# Altium PCB PCB1.PcbDoc
Units mm, origin at the board's own origin, x right, y up, seen from the top; angles counter-clockwise.
Board outline 38.6 x 37.7 mm, 2 copper layers (Top Layer, Bottom Layer); 48 components, 18 nets, 120 pads, 16 vias.
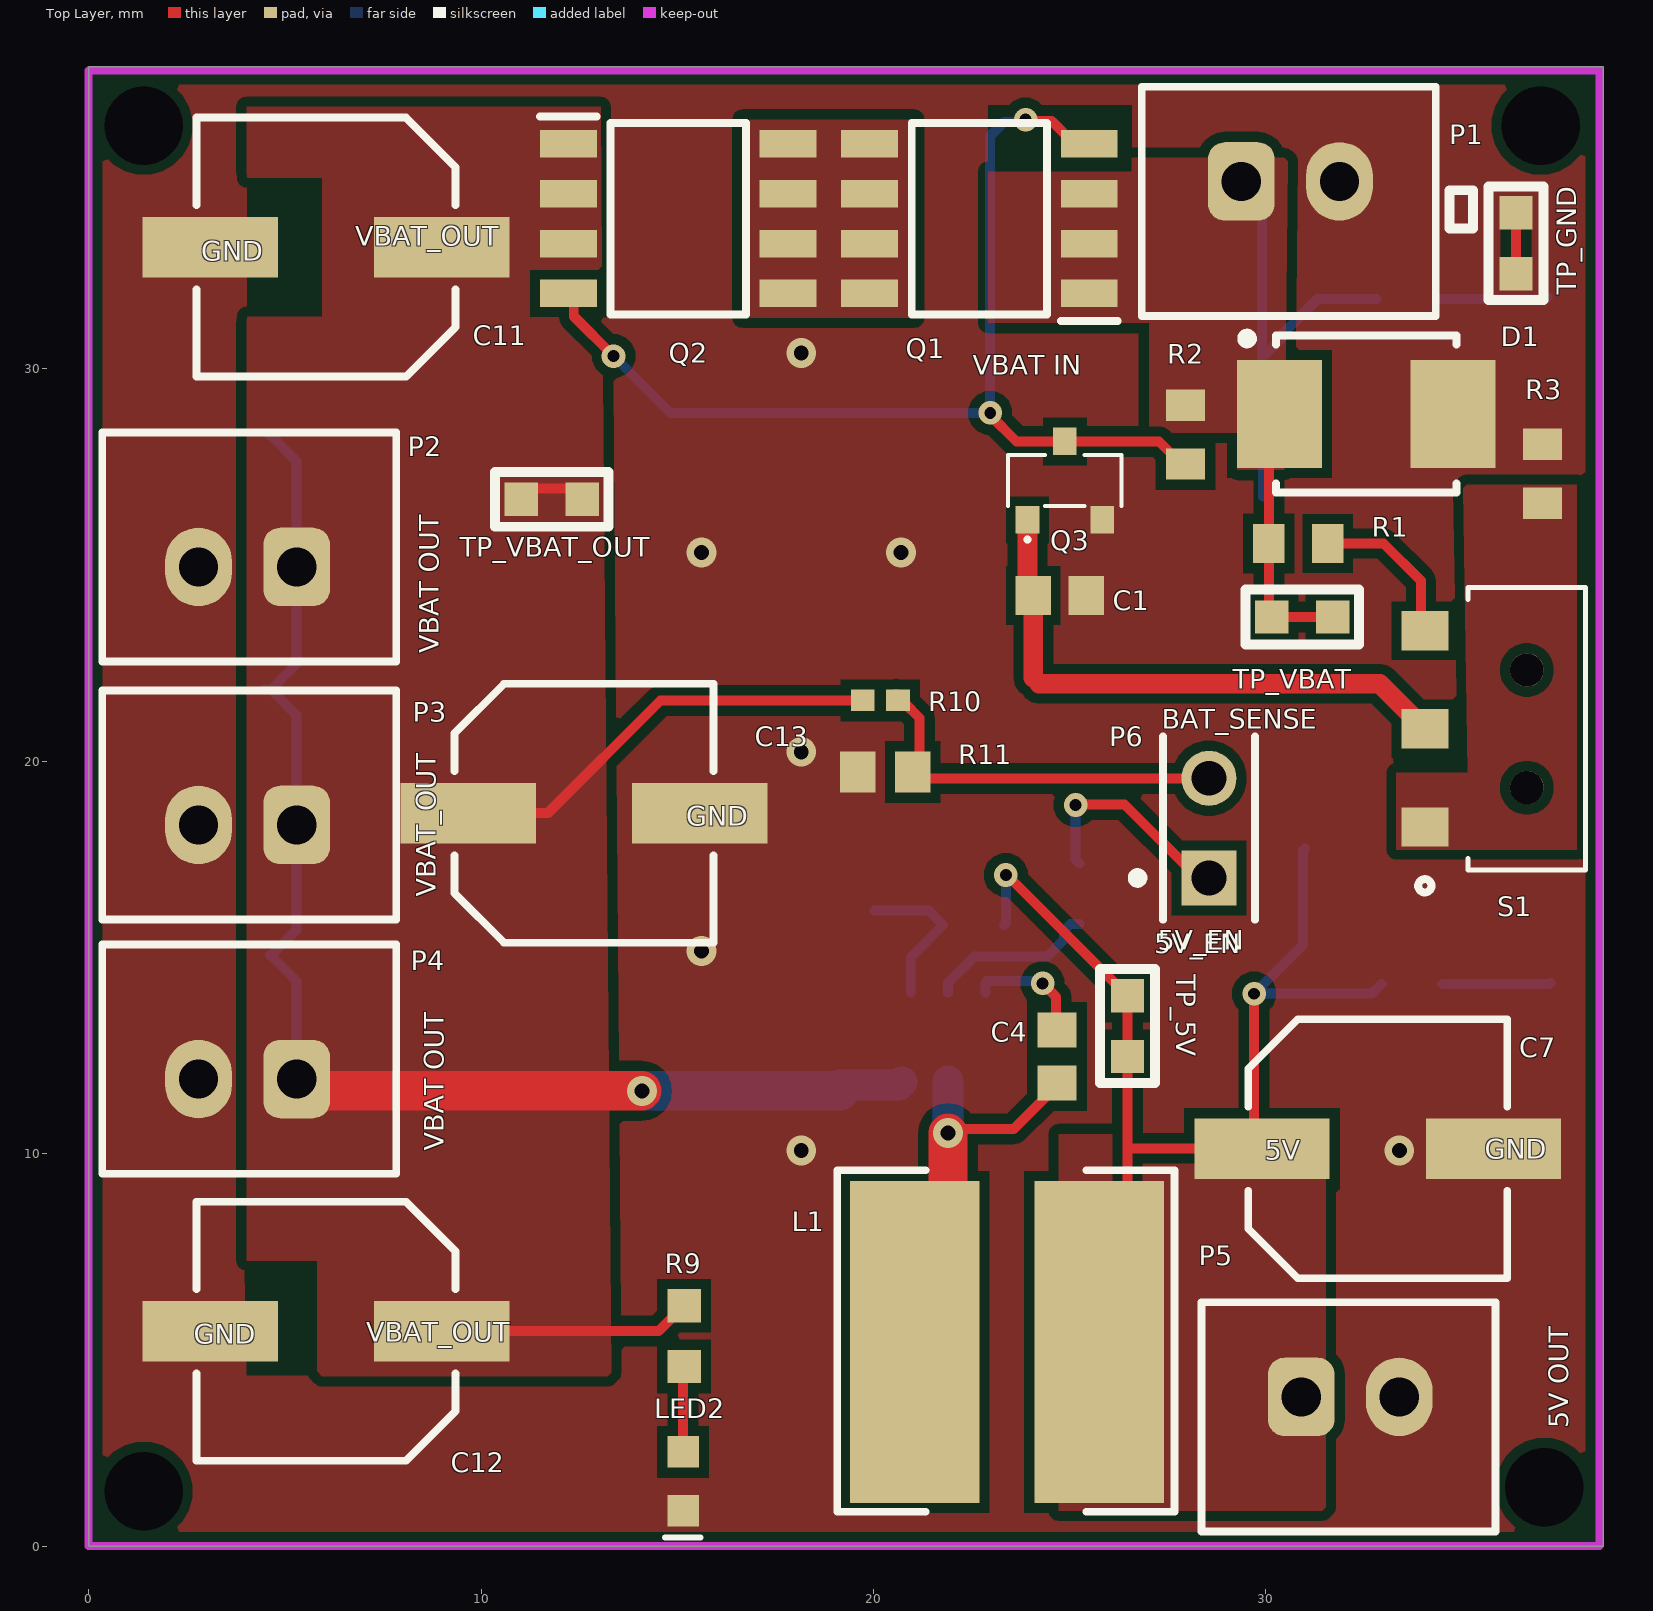
[diagram p0: Top Layer view]
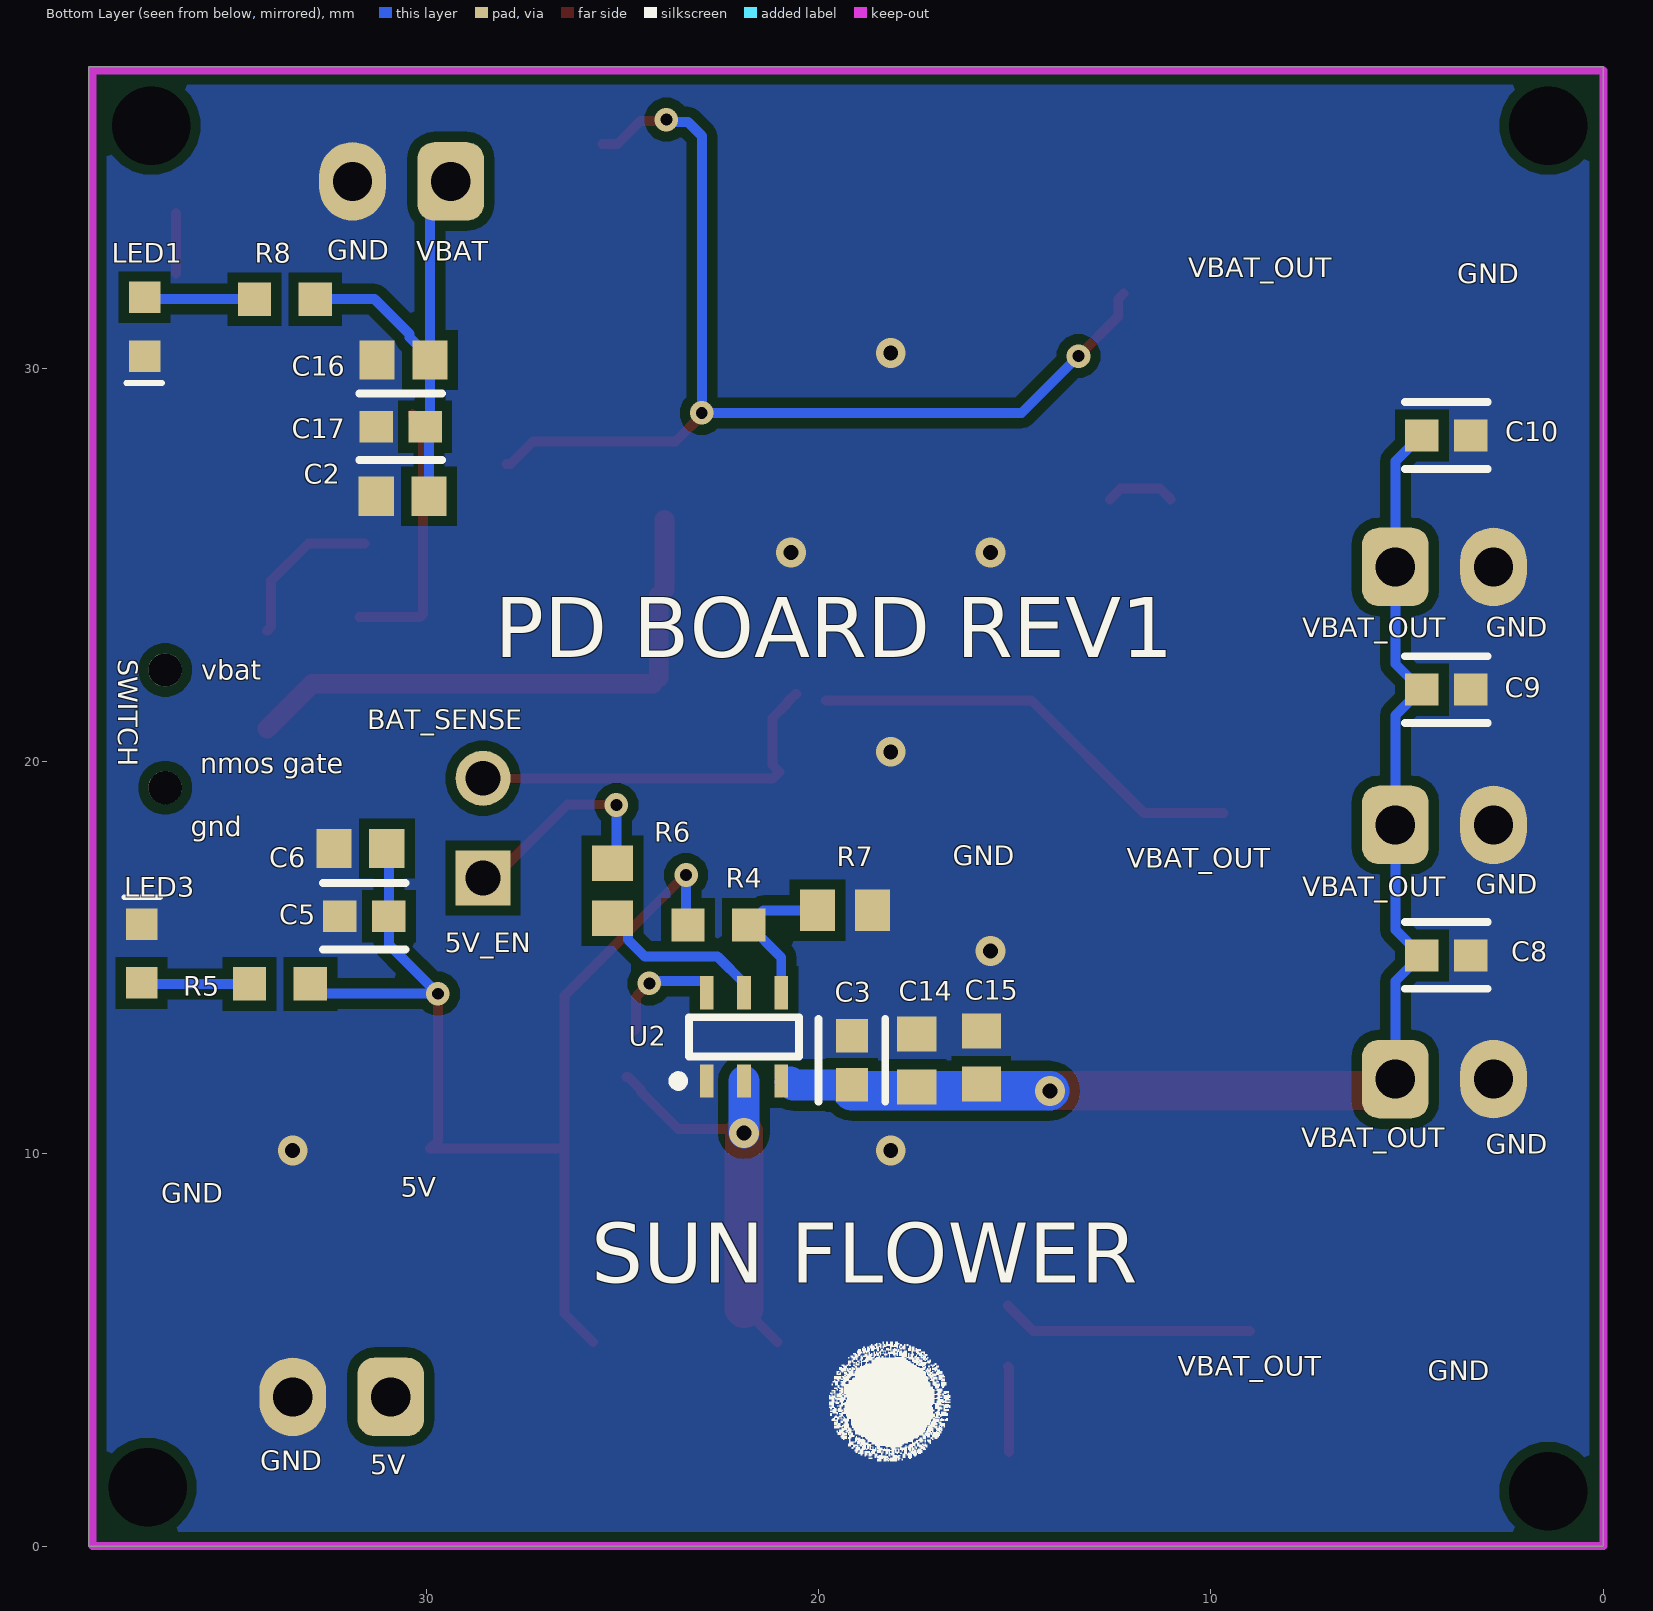
[diagram p1: Bottom Layer view, seen from below]
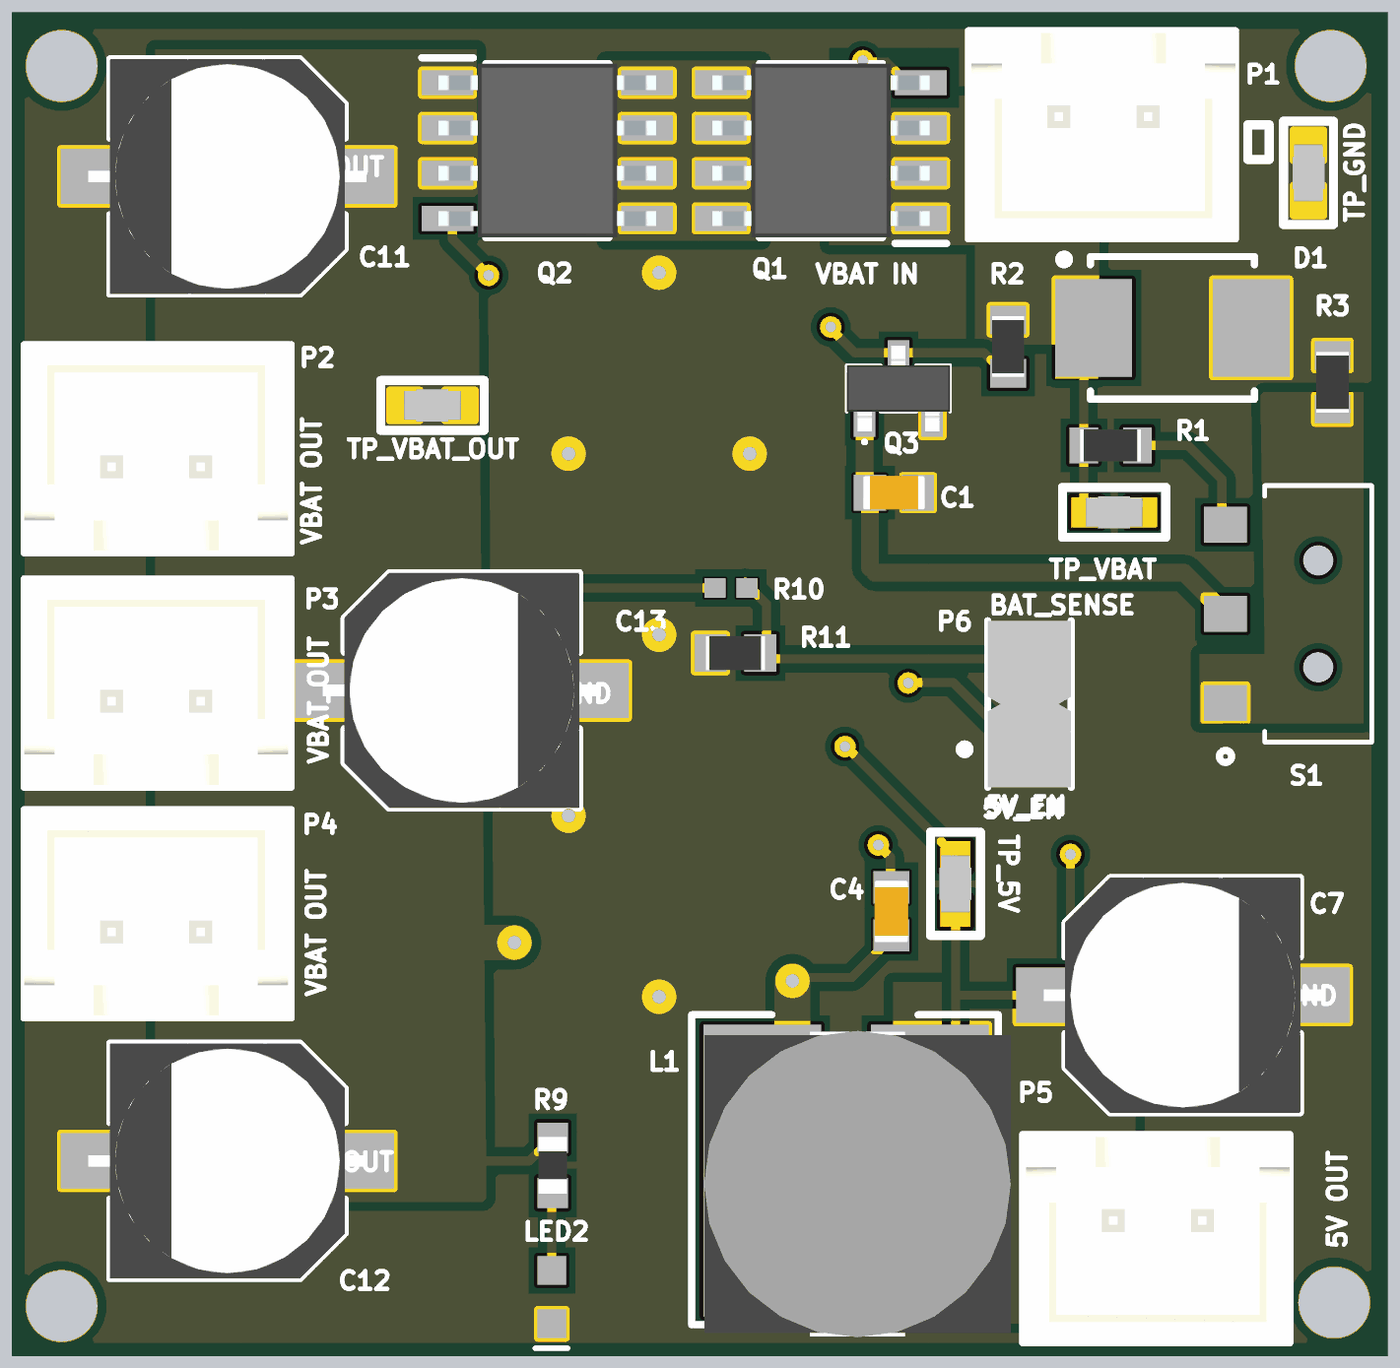
[diagram p2: 3D render of the assembled board from above, using the file's embedded part models]
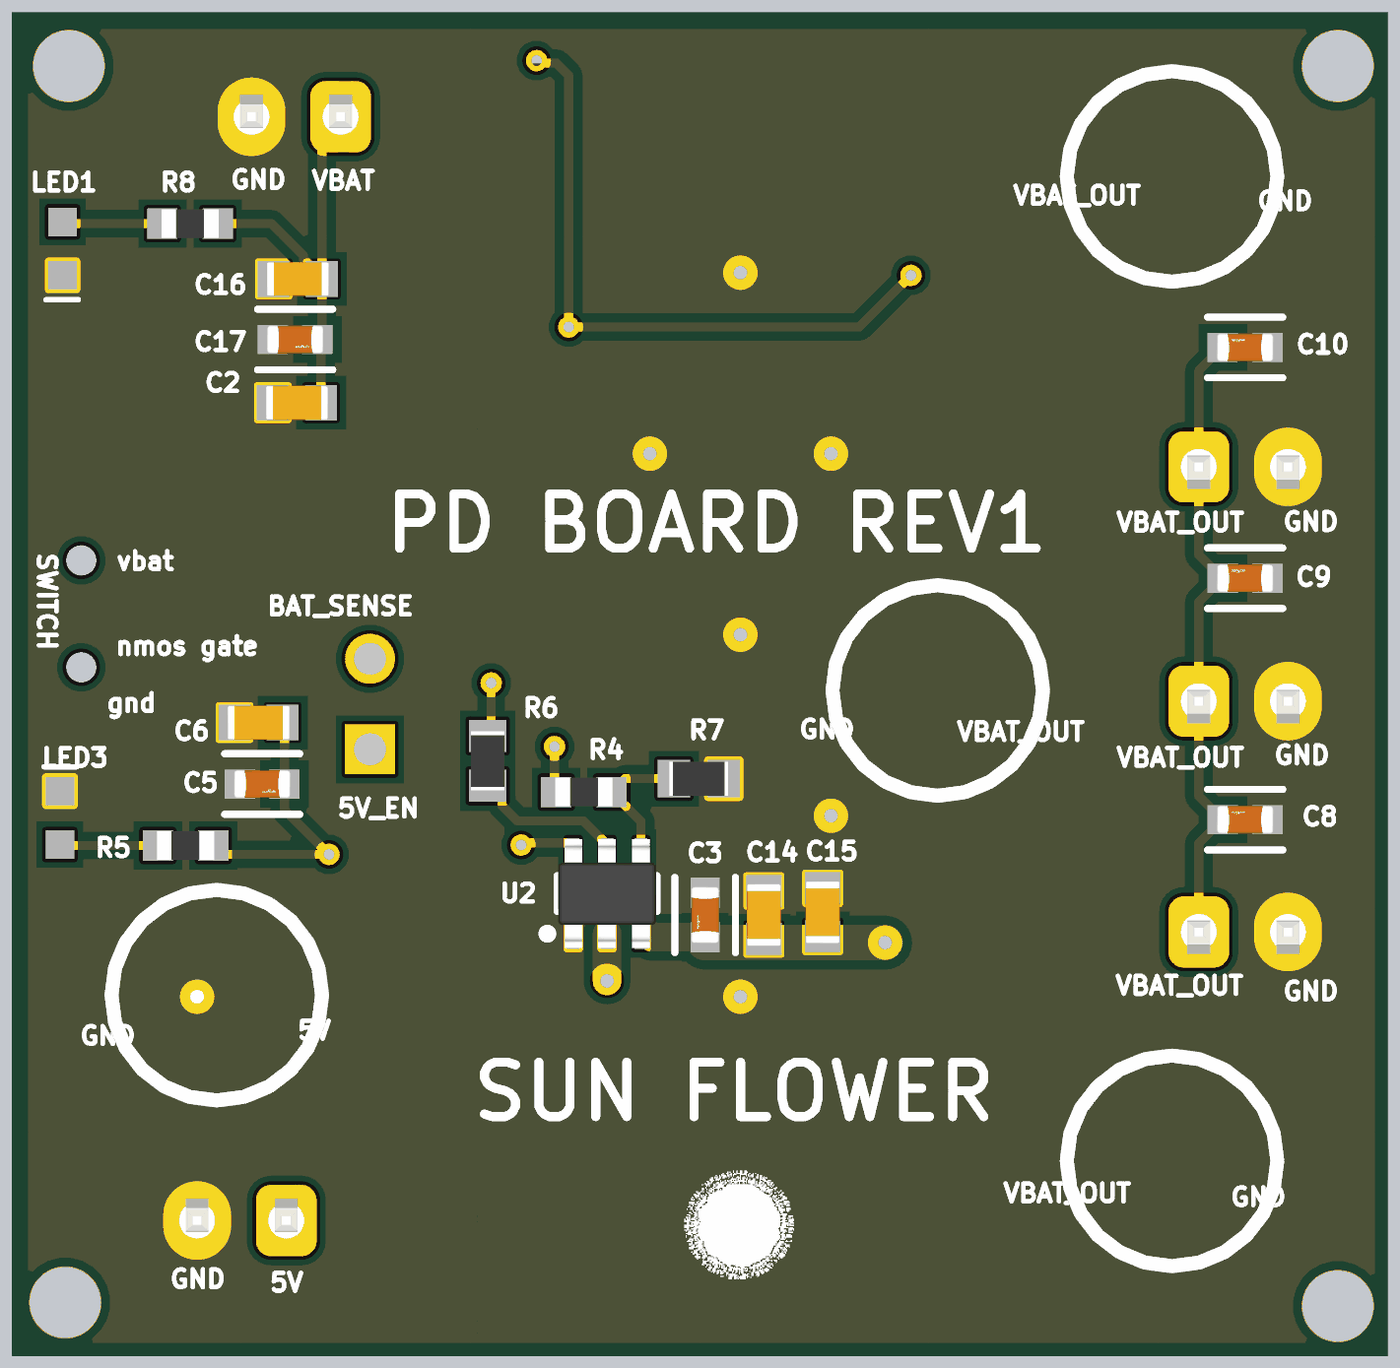
[diagram p3: 3D render of the assembled board from below, using the file's embedded part models]

## Layer stack, top to bottom
Top Solder: solder mask 0.0102, Solder Resist, Dk 3.5
Top Layer: signal copper 0.0356
Dielectric 1: dielectric 0.32, FR-4, Dk 4.8
Bottom Layer: signal copper 0.0356
Bottom Solder: solder mask 0.0102, Solder Resist, Dk 3.5

## Board outline
0,0 38.6,0 38.6,37.7 0,37.7

## Design rules (kind name [scope] priority, off if disabled: settings)
Clearance [All] p1: gap=0.254 ignorepadtopadclearanceinfootprint=FALSE except(0: Arc-Hole Track-Hole SMDPad-Hole THPad-Hole Via-Hole Fill-Hole Poly-Hole Region-Hole Text-Hole)
PlaneConnect [All] p1: planeconnectstyle=Direct reliefexpansion=0.508 reliefentries=4 reliefconductorwidth=0.254 reliefairgap=0.254
PolygonConnect PolygonConnect_1 [All vs IsNamedPolygon('NONET_L-01_P-001')] p1: connectstyle=Direct reliefconductorwidth=0.254 reliefentries=4 polygonreliefangle="90 Angle" airgapwidth=0.254
PolygonConnect [All] p2: connectstyle=Direct reliefconductorwidth=0.254 reliefentries=4 polygonreliefangle="90 Angle" airgapwidth=0.254
RoutingVias [All] p1: holewidth=0.711 width=1.27 viastyle="Through Hole" minholewidth=0.711 minwidth=1.27 maxholewidth=0.711 maxwidth=1.27
SolderMaskExpansion [All] p1: expansion=0.102 istentingtop=FALSE
Width [All] p1: maxlimit=5 minlimit=0.254 preferedwidth=0.254 minimp=50.000000 maximp=50.000000 favimp=50.000000
29 further rules are at their usual default settings.

## Components (designator, comment, footprint, x,y, rotation, side; value= is the part's Value field where it differs from the comment)
C1 "CAP CER 1UF 50V 10% X7R 0603" "CAP, 0603" 24.75,24.225 r0 top value=1µF
C2 "CMP-013-0018-1" "CAP, 0603" 30.6,26.75 r0 bottom value=10µF
C3 "CAP_0.1UF_50V_X7R_0603" FP-GCJ188-0_2-IPC_C 19.15,12.375 r270 bottom value=100nF
C4 "CMP-013-0022-3" "CAP, 0603" 24.675,12.475 r270 top value=100nF
C5 "CAP_0.1UF_50V_X7R_0603" FP-GCJ188-0_2-IPC_C 31.575,16.05 r180 bottom value=100nF
C6 "CMP-013-0018-1" "CAP, 0603" 31.675,17.775 r0 bottom value=10µF
C7 "CMP-013-0000-3" "CAP ALUM 6.3MM RADIAL SMD" 32.85,10.125 r0 top value=47µF
C8 "CAP_0.1UF_50V_X7R_0603" FP-GCJ188-0_2-IPC_C 4,15.05 r0 bottom value=100nF
C9 "CAP_0.1UF_50V_X7R_0603" FP-GCJ188-0_2-IPC_C 4,21.825 r0 bottom value=100nF
C10 "CAP_0.1UF_50V_X7R_0603" FP-GCJ188-0_2-IPC_C 4,28.3 r0 bottom value=100nF
C11 "CMP-013-0000-3" "CAP ALUM 6.3MM RADIAL SMD" 6.05,33.1 r180 top value=47µF
C12 "CMP-013-0000-3" "CAP ALUM 6.3MM RADIAL SMD" 6.05,5.475 r180 top value=47µF
C13 "CMP-013-0000-3" "CAP ALUM 6.3MM RADIAL SMD" 12.625,18.675 r0 top value=47µF
C14 "CMP-013-0018-1" "CAP, 0603" 17.5,12.375 r90 bottom value=10µF
C15 "CMP-013-0018-1" "CAP, 0603" 15.85,12.45 r90 bottom value=10µF
C16 "CMP-013-0018-1" "CAP, 0603" 30.575,30.225 r0 bottom value=10µF
C17 "CAP_0.1UF_50V_X7R_0603" FP-GCJ188-0_2-IPC_C 30.65,28.525 r180 bottom value=100nF
D1 "P6SMB12AT3G" ONSC-SMB-2-403A-03_J_V 32.56,28.85 r0 top
L1 "CMP-009-0008-2" "IND 3.3UH 5.2A 20 MOHM SMD VLP8040" 21.05,5.2 r0 top
LED1 "LED YELLOW CLEAR 2.1V 0603" LED_0603 37.175,31.075 r270 bottom
LED2 "LED GREEN CLEAR 2V 0603" LED_0603 15.15,1.65 r270 top
LED3 "LED BLUE CLEAR 2.8V 0603" LED_0603 37.25,15.1 r90 bottom
P1 "VBAT POWER IN" B2B-XH 29.375,34.775 r0 top
P2 "VBAT POWER OUT" B2B-XH 5.3,24.95 r180 top
P3 "VBAT POWER OUT" B2B-XH 5.3,18.375 r180 top
P4 "VBAT POWER OUT" B2B-XH 5.3,11.9 r180 top
P5 "5V POWER" B2B-XH 30.9,3.8 r0 top
P6 "5-146280-2" TECO-5-146280-2_V 28.55,18.295 r90 top
Q1 "SI4459BDY-T1-GE3" SI4459BDY-T1-GE3-Footprint-1 22.7,33.825 r180 top
Q2 "SI4459BDY-T1-GE3" SI4459BDY-T1-GE3-Footprint-1 15.025,33.825 r0 top
Q3 "T2N7002AK,LM" TBAT54CLM 24.875,27.15 r0 top
R1 "Resistor 100k +/-1% 0603 100 mW" RESC1608X55X25ML10T15 30.825,25.55 r180 top value=100k
R2 "Resistor 100k +/-1% 0603 100 mW" RESC1608X55X25ML10T15 27.95,28.325 r90 top value=100k
R3 "Resistor 100k +/-1% 0603 100 mW" RESC1608X55X25ML10T15 37.05,27.325 r270 top value=100k
R4 "CMP-010-0030-1" "RES, 0603" 22.55,15.825 r180 bottom
R5 "RES 4.7K OHM 1% 1/10W 0603" "RES, 0603" 33.725,14.325 r0 bottom
R6 "RES SMD 10K OHM 1% 1/10W 0603" RESC1609X50X30ML8T20 25.25,16.7 r90 bottom
R7 "RES SMD 10K OHM 1% 1/10W 0603" RESC1609X50X30ML8T20 19.325,16.2 r0 bottom
R8 "RES 4.7K OHM 1% 1/10W 0603" "RES, 0603" 33.6,31.775 r0 bottom
R9 "RES 4.7K OHM 1% 1/10W 0603" "RES, 0603" 15.175,5.35 r270 top
R10 "RES 6.8K OHM 5% 1/16W 0402" "RES 0402" 20.175,21.55 r180 top value=6.8k
R11 "RES SMD 10K OHM 1% 1/10W 0603" RESC1609X50X30ML8T20 20.3,19.725 r0 top
S1 "AYZ0102AGRLC" SW_AYZ0102AGRLC 36.5,20.825 r90 top
TP_5V "Test Point 0603 SMD" "TEST POINT 0603 SMD" 26.475,12.475 r90 top
TP_GND "Test Point 0603 SMD" "TEST POINT 0603 SMD" 36.375,32.425 r90 top
TP_VBAT "Test Point 0603 SMD" "TEST POINT 0603 SMD" 31.7,23.675 r180 top
TP_VBAT_OUT "Test Point 0603 SMD" "TEST POINT 0603 SMD" 12.575,26.675 r180 top
U2 "CMP-008-0027-1" "IC REG BUCK 4.5V TO 17V, 5A" 21.9,12.975 r90 bottom

## Footprints (in the part's own frame and the unit in brackets; to place one, negate y for a bottom-side part, rotate by r counter-clockwise, add the part's x,y. Pads: shape width x height; smd on the part's side, far side on the other; paste and mask are expansions set on the pad)
B2B-XH [mm] "JST 2-pin Header"
  rrect50% 1.7x2 hole 1: 1(0,0)
  oval 1.7x2 hole 1: 2(2.5,0)
  silkscreen extent -2.54,-3.43 4.95,2.41, body extent -2.45,-3.4 4.95,2.35, height 7
"CAP ALUM 6.3MM RADIAL SMD" [mm] "Aluminum Electrolytic Capacitor, Body 6.50x6.50x5.50mm, IPC Low Density"
  rect 3.45x1.55 smd: 1(-2.95,0) 2(2.95,0)
  silkscreen extent -3.3,-3.3 3.3,3.3, body extent -3.9,-3.3 3.9,3.3, height 5.5
"CAP, 0603" [mm] "Chip Capacitor, 2-Leads, Body 1.60x0.81mm, IPC Medium Density"
  rect 0.9x1 smd mask+0.076: 1(-0.675,0) 2(0.675,0)
  body extent -0.87,-0.48 0.87,0.48, height 0.9
FP-GCJ188-0_2-IPC_C [mm]
  rect 0.855x0.812 smd paste+0 mask+0: 1(-0.625,0) 2(0.625,0)
  silkscreen extent -1.05,-0.85 1.05,0.85, body extent -0.8,-0.4 0.8,0.4, height 0.9
"IC REG BUCK 4.5V TO 17V, 5A" [mm] "Buck Switching Regulator IC Positive Adjustable 0.6V 1 Output 5A SOT-23-6 Thin, TSOT-23-6"
  rect 0.85x0.35 smd: 1(-1.125,0.95) 2(-1.125,0) 3(-1.125,-0.95) 4(1.125,-0.95) 5(1.125,0) 6(1.125,0.95)
  silkscreen extent -1.25,-1.4 0.5,1.8, body extent -1.53,-1.38 1.53,1.38, height 1.1
"IND 3.3UH 5.2A 20 MOHM SMD VLP8040" [mm] "IND 3.3UH 5.2A 20 MOHM SMD"
  rect 3.3x8.2 smd: 1(0,0) 2(4.7,0)
  silkscreen extent -1.97,-4.32 6.63,4.38, body extent -1.62,-4.67 6.98,3.93, height 4.1
LED_0603 [mm]
  rect 0.8x0.8 smd: 1(-0.75,0) 2(0.75,0)
  silkscreen extent 1.43,-0.47 1.43,0.44, body extent -0.79,-0.4 0.81,0.4, height 0.8
ONSC-SMB-2-403A-03_J_V [mm] "Molded, 2-Leads, Body 4.6x3.95mm"
  rect 2.159x2.743 smd: 1(-2.21,0) 2(2.21,0)
  silkscreen extent -3.16,-2 2.3,2.05, body extent -2.3,-1.97 2.3,1.97, height 2.47
"RES 0402" [mm]
  rect 0.6x0.55 smd mask+0.05: 1(-0.45,0) 2(0.45,0)
  body extent -0.55,-0.27 0.55,0.28, height 0.5
"RES, 0603" [mm] "Chip Resistor, 2-Leads, Body 1.60x0.80mm, IPC Medium Density"
  rect 0.85x0.85 smd: 1(-0.775,0) 2(0.775,0)
  body extent -0.8,-0.4 0.8,0.4, height 0.55
RESC1608X55X25ML10T15 [mm] "Chip Resistor, 2-Leads, Body 1.70x0.90mm, IPC Low Density"
  rect 0.8x1 smd: 1(-0.75,0) 2(0.75,0)
  body extent -0.85,-0.45 0.85,0.45, height 0.55
RESC1609X50X30ML8T20 [mm] "Chip Resistor, 2-Leads, Body 1.65x0.95mm, IPC Low Density"
  rect 0.9x1.05 smd: 1(-0.7,0) 2(0.7,0)
  body extent -0.82,-0.48 0.82,0.48, height 0.5
SI4459BDY-T1-GE3-Footprint-1 [mm]
  rect 1.45x0.7 smd: 1(-2.8,1.905) 2(-2.8,0.635) 3(-2.8,-0.635) 4(-2.8,-1.905) 5(2.8,-1.905) 6(2.8,-0.635) 7(2.8,0.635) 8(2.8,1.905)
  silkscreen extent -3.52,-2.44 1.73,2.61, body extent -3.05,-2.44 3.05,2.44, height 3.23
SW_AYZ0102AGRLC [mm]
  rect 1x1.2 smd: 1(-2.5,2.45) 2(0,2.45) 3(2.5,2.45)
  round 0.85 hole 0.85 unplated: ""(-1.5,-0.15) ""(1.5,-0.15)
  silkscreen extent -4.17,-1.65 3.6,2.62
TBAT54CLM [mm]
  rect 0.6x0.7 smd: 1(-0.95,-1) 2(0.95,-1) 3(0,1)
  silkscreen extent -1.45,-1.55 1.45,0.65, body extent -1.45,-1.2 1.45,1.2, height 0.95
TECO-5-146280-2_V [mm] "Connector, 2-Leads, Body 4.67x2.34mm, Pitch 2.54mm"
  rect 1.4x1.4 hole 0.89: 1(-1.27,0)
  round 1.4 hole 0.89: 2(1.27,0)
  silkscreen extent -2.33,-1.17 2.33,1.94, body extent -2.34,-1.17 2.34,1.17, height 5.33
"TEST POINT 0603 SMD" [mm]
  rect 0.85x0.85 smd paste-2 mask+0.102: 1(0,0)
  rect 0.85x0.85 smd paste-2: 1(1.55,0)
  silkscreen extent -0.67,-0.7 2.22,0.7, body extent -0.02,-0.45 1.58,0.45, height 1.09

## Part data
C1: library part CMP-013-0013-1, "1µF ±10% 50V Ceramic Capacitor X7R 0603 (1608 Metric)", Manufacturer 1="Taiyo Yuden", Manufacturer Part Number 1=UMK107AB7105KA-T, Operating Temperature="-55°C ~ 125°C", Package / Case="0603 (1608 Metric)", Ratings=-, Temperature Coefficient=X7R, Tolerance=10%, Voltage=50V, ComponentLink1Description=http://www.yuden.co.jp/productdata/catalog/en/mlcc_all_e.pdf, ComponentLink1URL=http://www.yuden.co.jp/productdata/catalog/en/mlcc_all_e.pdf, Design Item ID="CAP CER 1UF 50V 10% X7R 0603", Height - Seated (Max)=-, Lead Spacing=-, Lead Style=-, Mounting Type="Surface Mount, MLCC", Packaging="Cut Tape (CT)", Part Status=Active, Source="Schematic Diagrams.SchLib"
C2 C6 C14 C15 C16: "10µF ±20% 25V Ceramic Capacitor X5R 0603 (1608 Metric)", Manufacturer 1="Murata Electronics North America", Manufacturer Part Number 1=GRM188R61E106MA73D, Operating Temperature="-55°C ~ 85°C", Package / Case="0603 (1608 Metric)", Ratings=-, Temperature Coefficient=X5R, Tolerance=20%, Voltage=25V, ComponentLink1Description=http://www.murata.com/~/media/webrenewal/support/library/catalog/products/capacitor/mlcc/c02e.ashx, ComponentLink1URL=http://www.murata.com/~/media/webrenewal/support/library/catalog/products/capacitor/mlcc/c02e.ashx, Design Item ID="CAP CER 10uF 25V 20% X5R 0603", Height - Seated (Max)=-, Lead Spacing=-, Lead Style=-, Mounting Type="Surface Mount, MLCC", Packaging="Cut Tape (CT)", Part Status=Active, Size / Dimension="0.063\" L x 0.031\" W (1.60mm x 0.80mm)", Source="Schematic Diagrams.SchLib", Thickness (Max)="0.031\" (0.80mm)"
C3 C5 C8 C9 C10 C17: library part CMP-001-00108-2, "CAP CER 0.1UF 50V X7R 0603", Capacitor Type=Ceramic, Case/Package=0603, Manufacturer 1="Murata Electronics", Manufacturer Part Number 1=GCJ188R71H104KA12D, Max Operating Temperature=125°C, Min Operating Temperature=-55°C, Temperature Coefficient=X7R, Tolerance=10%, Voltage Rating=50V, Mounting Technology="Surface Mount", Pins=2, RoHS Compliant=Yes
C4: "0.10µF ±10% 50V Ceramic Capacitor X7R 0603 (1608 Metric)", Manufacturer 1="AVX Corporation", Manufacturer Part Number 1=06035C104KAT2A, Operating Temperature="-55°C ~ 125°C", Package / Case="0603 (1608 Metric)", Ratings=-, Supplier Part Number 1=478-5052-1-ND, Tolerance=10%, Voltage=50V, ComponentLink1Description=http://datasheets.avx.com/X7RDielectric.pdf, ComponentLink1URL=http://datasheets.avx.com/X7RDielectric.pdf, Design Item ID="CAP CER 0.1UF 50V 10% X7R 0603", Height - Seated (Max)=-, Lead Spacing=-, Lead Style=-, Mounting Type="Surface Mount, MLCC", Packaging="Cut Tape (CT)", Part Status=Active, Size / Dimension="0.063\" L x 0.032\" W (1.60mm x 0.81mm)", Source="Schematic Diagrams.SchLib", Supplier 1=Digi-key, Thickness (Max)="0.035\" (0.90mm)"
C7 C11 C12 C13: "47µF 35V Aluminum Electrolytic Capacitors Radial, Can - SMD 1000 Hrs @ 85°C", Case/Package=Radial, Manufacturer 1=Panasonic, Manufacturer Part Number 1=EEE-1VA470WP, Max Operating Temperature=85°C, Min Operating Temperature=-40°C, Package Quantity=1, Ripple Current=70mA, Supplier Part Number 1=PCE3961DKR-ND, Tolerance=20%, Voltage Rating=35V, ComponentLink1Description=https://datasheet.ciiva.com/2983/aba0000ce2-2983926.pdf, ComponentLink1URL=https://datasheet.ciiva.com/2983/aba0000ce2-2983926.pdf, ComponentLink2Description=https://datasheet.ciiva.com/2983/aba0000ce2-2983927.pdf, ComponentLink2URL=https://datasheet.ciiva.com/2983/aba0000ce2-2983927.pdf, ComponentLink3Description=https://datasheet.ciiva.com/14598/70255710-14598937.pdf, ComponentLink3URL=https://datasheet.ciiva.com/14598/70255710-14598937.pdf, ComponentLink4Description=https://datasheet.ciiva.com/15165/getdatasheetpartid-86239-15165868.pdf, ComponentLink4URL=https://datasheet.ciiva.com/15165/getdatasheetpartid-86239-15165868.pdf, ComponentLink5Description=https://datasheet.ciiva.com/16507/aba0000ce2-16507965.pdf, ComponentLink5URL=https://datasheet.ciiva.com/16507/aba0000ce2-16507965.pdf, ComponentLink6Description=https://datasheet.ciiva.com/30206/11aba0000ce2-30206253.pdf, ComponentLink6URL=https://datasheet.ciiva.com/30206/11aba0000ce2-30206253.pdf, Contact Plating=Tin, Design Item ID="CAP ALUM 47UF 20% 35V SMD", Diameter=6.3mm, Height=5.4mm, Height - Seated (Max)=0.213inch, Lead Free="Lead Free", Length=5.5mm, Life (Hours)=1000Hour, Mount="Surface Mount,PCB", Packaging="Tape and Reel", Pricing 1="1=0.38, 10=0.263, 100=0.1579, 500=0.11846 (USD)", Radiation Hardening=No, REACH SVHC=Unknown, Ripple Current (AC)=70mA, Source="Schematic Diagrams.SchLib", Stock 1=2820, Supplier 1=Digi-Key, Termination=SMD/SMT, Voltage Rating (DC)=35V
D1: library part CMP-1061-00398-1, "600 W Peak Power Zener Transient Voltage Suppressor, Unidirectional, 2-Pin SMB, Pb-Free, Tape and Reel", Manufacturer="On Semiconductor", ComponentLink1Description="Manufacturer URL", ComponentLink1URL=http://www.onsemi.com/, ComponentLink2Description=Datasheet, ComponentLink2URL=http://www.onsemi.com/pub_link/Collateral/P6SMB6.8AT3-D.PDF, ComponentLink3Description="Package Specification", ComponentLink3URL=http://www.onsemi.com/pub_link/Collateral/P6SMB6.8AT3-D.PDF, DatasheetVersion="Rev. J", Direction=Unidirectional, IR Max (uA)=5, Mounting Technology="Surface Mount", PackageDescription="2-Pin Small Molded Package, J-Bend Lead, Body 4.33 x 3.625 mm", PackageReference=SMB-2-403A-03_J, PackageVersion="Rev. J, 07/2012", Packing="Tape and Reel", PartNumber=P6SMB12AT3G, PPK Max (W)=600, RoHS=Pb-Free, V(BR) Typ (V)=12
L1: "3.3µH Shielded Wirewound Inductor 5.2A 20 mOhm Max Nonstandard", Case/Package=Nonstandard, Current - Saturation=1.04A, Current Rating=1.37A, DC Resistance (DCR)="170 mOhm Max", Frequency - Self Resonant=-, Frequency - Test=1MHz, Inductance=3.3µH, Inductance Tolerance=30%, Manufacturer 1="TDK Corporation", Manufacturer Part Number 1=VLS201612CX-3R3M, Max DC Current=5.2A, Max Operating Temperature=105°C, Min Operating Temperature=-40°C, Operating Temperature="-40°C ~ 105°C", Package Quantity=1, Supplier Device Package=2016, Supplier Part Number 1=445-172964-1-ND, Test Frequency=100kHz, Tolerance=20%, ComponentLink1Description=http://product.tdk.com/en/catalog/datasheets/inductor_commercial_power_vls-cx_en.pdf, ComponentLink1URL=http://product.tdk.com/en/catalog/datasheets/inductor_commercial_power_vls-cx_en.pdf, ComponentLink2Description=http://www.mouser.com/ds/2/400/nductor_commercial_power_vlp8040_en-952627.pdf, ComponentLink2URL=http://www.mouser.com/ds/2/400/nductor_commercial_power_vlp8040_en-952627.pdf, Composition=Wirewound, Core Material=Ferrite, Depth=8.7mm, Design Item ID="IND 3.3uH 5.2A 20MOHM SMD", Height=4mm, Height - Seated (Max)="0.047\" (1.20mm)", Lead Free="Lead Free", Length=0.315inch, Material - Core=Ferrite, Military Standard=Not, Mount="Surface Mount", Mounting Type="Surface Mount", Package / Case=Nonstandard, Packaging="Cut Tape (CT)", Pricing 1="1 = 0.60000, 10 = 0.52700, 100 = 0.37660, 500 = 0.31636 (USD)", Q @ Freq=-, REACH SVHC="No SVHC", RMS Current (Irms)=5.2A, RoHS="RoHS Compliant", Saturation Current=5.2A, Shielding=Shielded, Size / Dimension="0.079\" L x 0.063\" W (2.00mm x 1.60mm)", Source="Schematic Diagrams.SchLib", Stock 1=8114, Supplier 1=Digi-Key, Termination=SMD/SMT, Width=8mm
LED1: library part CMP-011-0011-2, "Yellow 590nm LED Indication - Discrete 2V 0603 (1608 Metric)", Case/Package="0603 (1608 Metric)", Color=Yellow, Current - Test=20mA, Lens Color=Colorless, Manufacturer="Wurth Electronics Inc.", Manufacturer Part Number=150060YS75000, Millicandela Rating=120mcd, Supplier Device Package=0603, Voltage - Forward (Vf) (Typ)=2V, ComponentLink1Description=http://katalog.we-online.de/led/datasheet/150060YS75000.pdf, ComponentLink1URL=http://katalog.we-online.de/led/datasheet/150060YS75000.pdf, Design Item ID="LED YELLOW CLEAR 2.1V 0603", Features=-, Height (Max)=0.80mm, Lens Style/Size="Rectangle with Flat Top, 1.10mm x 0.70mm", Lens Transparency=Clear, Mounting Type="Surface Mount", Packaging="Cut Tape (CT)", Part Status=Active, Pricing 1="1=0.21, 100=0.1617, 500=0.13964 (CAD)", RoHS="RoHS Compliant", Size / Dimension="1.60mm L x 0.80mm W", Source="Schematic Diagrams.SchLib", Stock 1=10523, Viewing Angle=140°, Wavelength - Dominant=590nm, Wavelength - Peak=595nm
LED2: library part CMP-011-0009-2, "Green 572nm LED Indication - Discrete 2V 0603 (1608 Metric)", Case/Package="0603 (1608 Metric)", Color=Green, Current - Test=20mA, Lens Color=Colorless, Manufacturer="Wurth Electronics Inc.", Manufacturer Part Number=150060VS75000, Millicandela Rating=40mcd, Supplier Device Package=0603, Voltage - Forward (Vf) (Typ)=2V, ComponentLink1Description=http://katalog.we-online.de/led/datasheet/150060VS75000.pdf, ComponentLink1URL=http://katalog.we-online.de/led/datasheet/150060VS75000.pdf, Design Item ID="LED GREEN CLEAR 2V 0603", Features=-, Height (Max)=0.80mm, Lens Style/Size="Rectangle with Flat Top, 1.10mm x 0.70mm", Lens Transparency=Clear, Mounting Type="Surface Mount", Packaging="Cut Tape (CT)", Part Status=Active, Pricing 1="1=0.21, 100=0.1617, 500=0.13964 (CAD)", RoHS="RoHS Compliant", Size / Dimension="1.60mm L x 0.80mm W", Source="Schematic Diagrams.SchLib", Stock 1=9408, Viewing Angle=140°, Wavelength - Dominant=570nm, Wavelength - Peak=572nm
LED3: library part CMP-011-0010-2, "Blue 470nm LED Indication - Discrete 2.8V 0603 (1608 Metric)", Case/Package="0603 (1608 Metric)", Color=Blue, Current - Test=5mA, Lens Color=Colorless, Manufacturer 1="Lite-On Inc.", Manufacturer Part Number 1=LTST-C193TBKT-5A, Millicandela Rating=15mcd, Supplier Device Package="Chip LED", Voltage - Forward (Vf) (Typ)=2.8V, ComponentLink1Description=http://optoelectronics.liteon.com/upload/download/DS22-2004-060/P_100_LTST-C193TBKT-5A.pdf, ComponentLink1URL=http://optoelectronics.liteon.com/upload/download/DS22-2004-060/P_100_LTST-C193TBKT-5A.pdf, Design Item ID="LED BLUE CLEAR 2.8V 0603", Height (Max)=0.45mm, Lens Style/Size="Rectangle with Flat Top, 1.15mm x 0.80mm", Lens Transparency=Clear, Mounting Type="Surface Mount", Packaging="Cut Tape (CT)", Part Status=Active, Size / Dimension="1.60mm L x 0.80mm W", Source="Schematic Diagrams.SchLib", Viewing Angle=130°, Wavelength - Dominant=470nm, Wavelength - Peak=468nm
P1 P2 P3 P4 P5: library part "1x2 Header", "1x2 Pin Header"
  P1: ComponentLink1Description="New link", ComponentLink2Description="New link 1"
P6: library part CMP-2000-07492-1, "Male Header, Pitch 2.54 mm, 1 x 2 Position, Height 8.21 mm, Tail Length 3.05 mm, -65 to 105 degC, RoHS, Bulk", Case\/Package=100, Colour=Black, Current Rating=3A, Flammability Rating=UL94V-0, High Temperature Housing=Yes, Manufacturer="TE Connectivity", Max Current Rating=5A, Max Operating Temperature=105degC, Min Operating Temperature=-65degC, Package Description="Male Header, Pitch 2.54 mm, 1 x 2 Position, Height 8.21 mm, Tail Length 3.05 mm", Package Quantity=500, Approvals=CSA, Board Standoff=No(Without), Connector Type=Header, Contact Gender=Male, Contact Material=CopperAlloy, Contact Mating Length=0.23inch, Contact Plating=Matte, Contact Protection=No(Without), Contact Shape=Square, Datasheet URL=http://www.te.com/commerce/DocumentDelivery/DDEController?Action=showdoc&DocId=Customer+Drawing%7F146280%7FH1%7Fpdf%7FEnglish%7FENG_CD_146280_H1.pdf%7F5-146280-2, Datasheet Version="Rev. H1, 08/2016", Depth=2.34mm, Gasket=No(Without), High Speed Serial Data Connector=No, Housing Colour=Black, Housing Material=Polymer, Keyed=No, Length=4.67mm, Manufacturer URL=http://www.te.com/, Mating Alignment=No(Without), Mating Connector Lock=No(Without), Mating Post Length=0.23inch, Mount=ThroughHole, Mounting Technology=ThroughHole, Number of Contacts=2, Number of Positions=2, Number of Rows=1, Orientation=Straight, Package Reference=5-146280-2, Packaging=Carton, Panel Mount Retention=No(Without), PCB Mount Retention=Without, PCB Mounting Orientation=Vertical, PCB Thickness=0.063inch, Pitch=2.54mm, Radiation Hardening=No, RoHSCompliant=true, Row Spacing=2.54mm, Selectively Loaded=No(Without), Stabilizers=No(Without), Termination=ThroughHole, Termination Post Length=0.12inch
Q1 Q2: library part CMP-031-00041-1, "Small Signal Field-Effect Transistor", RoHS Compliant=Yes
Q3: "MOSFET (N-Channel)", Manufacturer_Name=Toshiba, Mouser Part Number=757-T2N7002AKLM, Arrow Part Number=T2N7002AK,LM, Arrow Price/Stock=https://www.arrow.com/en/products/t2n7002aklm/toshiba?region=nac, Datasheet Link=http://toshiba.semicon-storage.com/info/docget.jsp?did=29712&prodName=T2N7002AK, Height=1.1mm, Manufacturer_Part_Number=T2N7002AK,LM, Mouser Price/Stock=https://www.mouser.co.uk/ProductDetail/Toshiba/T2N7002AKLM?qs=pzVvXTvk9PzfX4hYglwZ9Q%3D%3D, Supplier 1=Avnet, Supplier Part Number 1=T2N7002AK,LM
R1 R2 R3: library part CMP-009-00023-2, "Chip Resistor, 100 KOhm, +/- 1%, 0.1 W, -55 to 155 degC, 0603 (1608 Metric)", Case/Package=0603, Max Operating Temperature=155°C, Min Operating Temperature=-55°C, Power=100mW, Resistance=100k, Tolerance=1%, Voltage Rating=50V, Mounting Technology=SM, Pins=2, RoHS Compliant=True
R4: "54.9k Ohm ±1% 0.1W, 1/10W Chip Resistor 0603 (1608 Metric) Automotive AEC-Q200 Thick Film", Manufacturer="Panasonic Electronic Components", Operating Temperature="-55°C ~ 155°C", Package / Case="0603 (1608 Metric)", Power (Watts)=1/10W, Resistance (Ohms)=54.9k, Supplier Device Package=0603, Temperature Coefficient=±100ppm/°C, Tolerance=1%, ComponentLink1Description=https://industrial.panasonic.com/cdbs/www-data/pdf/RDA0000/AOA0000C298.pdf, ComponentLink1URL=https://industrial.panasonic.com/cdbs/www-data/pdf/RDA0000/AOA0000C298.pdf, ComponentLink2Description="New link", Composition="Thick Film", Design Item ID="RES 54.9K OHM 1% 1/10W 0603", Failure Rate=-, Features="Automotive AEC-Q200", Height - Seated (Max)="0.022\" (0.55mm)", Packaging="Cut Tape (CT)", Part Status=Active, Pricing 1="1=0.16, 10=0.031, 100=0.0127, 1000=0.00567, 2500=0.00492 (CAD)", RoHS="RoHS Compliant", Size / Dimension="0.063\" L x 0.031\" W (1.60mm x 0.80mm)", Source="Schematic Diagrams.SchLib", Stock 1=74038
R5 R8 R9: library part CMP-010-0129-1, "4.7k Ohm ±1% 0.1W, 1/10W Chip Resistor 0603 (1608 Metric) Moisture Resistant Thick Film", Manufacturer 1=Yageo, Manufacturer Part Number 1=RC0603FR-074K7L, Operating Temperature="-55°C ~ 155°C", Package / Case="0603 (1608 Metric)", Resistance (Ohms)=4.7k, Supplier Device Package=0603, Temperature Coefficient=±100ppm/°C, Tolerance=1%, ComponentLink1Description=http://www.yageo.com/documents/recent/PYu-RC_Group_51_RoHS_L_7.pdf, ComponentLink1URL=http://www.yageo.com/documents/recent/PYu-RC_Group_51_RoHS_L_7.pdf, Composition="Thick Film", Description 1="RES SMD 4.7K OHM 1% 1/10W 0603", Design Item ID="RES 4.7K OHM 1% 1/10W 0603", Failure Rate=-, Features="Moisture Resistant", Packaging="Cut Tape (CT)", Part Status=Active, Pricing 1="1=0.16, 10=0.022, 100=0.0089, 1000=0.00402, 2500=0.00349 (CAD)", RoHS="RoHS Compliant", Source="Schematic Diagrams.SchLib", Stock 1=3487566
R6: library part CMP-009-00200-4, "Fixed Resistor, Metal Glaze/thick Film, 0.1W, 10000ohm, 75V, 1% +/-Tol, 100ppm/Cel, Surface Mount, 0603", Manufacturer 1=Vishay, Manufacturer Part Number 1=CRCW060310K0FKEA, Max Operating Temperature=155°C, Min Operating Temperature=-55°C, Package Height=0.45mm, Package Length=1.55mm, Package Shape=Rectangular, Package Style=SMTMeter, Package Width=0.85mm, Rated Temperature=70°C, Resistance=10k, Resistor Type="FIXED RESISTOR", Supplier Part Number 1=541-10.0KHCT-ND, Temperature Coefficient=100ppm/°C, Tolerance=1%, Working Voltage=75V, Construction=Chip, JESD-609 Code=e3, Mount="Surface Mount", Number of Terminals/Pins=2, Packaging="Tape and Reel", Reference Standard=AEC-Q200, Size Code=0603, Supplier 1=Digi-Key, Technology="METAL GLAZE/THICK FILM", Terminal Finish=Nickel, Termination=Wraparound
R7 R11: library part CMP-009-00200-4, "Fixed Resistor, Metal Glaze/thick Film, 0.1W, 10000ohm, 75V, 1% +/-Tol, 100ppm/Cel, Surface Mount, 0603", Manufacturer 1=Vishay, Manufacturer Part Number 1=CRCW060310K0FKEA, Max Operating Temperature=155°C, Min Operating Temperature=-55°C, Package Height=0.45mm, Package Length=1.55mm, Package Shape=Rectangular, Package Style=SMTMeter, Package Width=0.85mm, Rated Power Dissipation (P)=100mW, Rated Temperature=70°C, Resistance=10kR, Resistor Type="FIXED RESISTOR", Supplier Part Number 1=541-10.0KHCT-ND, Temperature Coefficient=100ppm/°C, Tolerance=1%, Working Voltage=75V, Construction=Chip, JESD-609 Code=e3, Mount="Surface Mount", Number of Terminals/Pins=2, Packaging="Tape and Reel", Reference Standard=AEC-Q200, Size Code=0603, Supplier 1=Digi-Key, Technology="METAL GLAZE/THICK FILM", Terminal Finish=Nickel, Termination=Wraparound
  R11: ComponentLink1Description="New link"
R10: library part CMP-009-00248-1, "Fixed Resistor, Metal Glaze/thick Film, 0.0625W, 6800ohm, 50V, 5% +/-Tol, 100ppm/Cel, Surface Mount, 0402", Case/Package=0.35mm, Manufacturer=Yageo, Manufacturer Part Number=RC0402JR-076K8L, Max Operating Temperature=155°C, Min Operating Temperature=-55°C, Package Length=1mm, Package Shape=Rectangular, Package Style=SMTMeter, Package Width=0.5mm, Rated Power Dissipation (P)=62.5mW, Rated Temperature=70°C, Resistor Type="FIXED RESISTOR", Temperature Coefficient=100ppm/°C, Tolerance=5%, Working Voltage=50V, Additional Feature="LASER TRIMMABLE", Category="Chip SMD Resistors", ComponentLink1Description=https://datasheet.ciiva.com:443/pdfs/VipMasterIC/IC/YAGO/YAGO-S-A0008145938/YAGO-S-A0008145938-1.pdf?src-supplier=IHS+Markit, ComponentLink1URL=https://datasheet.ciiva.com:443/pdfs/VipMasterIC/IC/YAGO/YAGO-S-A0008145938/YAGO-S-A0008145938-1.pdf?src-supplier=IHS+Markit, ComponentLink2Description=https://datasheet.ciiva.com/2452/pyu-r-int-thick-7-2452782.pdf?src-supplier=Digi-Key, ComponentLink2URL=https://datasheet.ciiva.com/2452/pyu-r-int-thick-7-2452782.pdf?src-supplier=Digi-Key, ComponentLink3Description=https://datasheet.ciiva.com/2452/pyu-r-int-thick-7-2452783.pdf?src-supplier=Digi-Key, ComponentLink3URL=https://datasheet.ciiva.com/2452/pyu-r-int-thick-7-2452783.pdf?src-supplier=Digi-Key, ComponentLink4Description=https://datasheet.ciiva.com/2452/pyu-r-int-thick-7-2452784.pdf?src-supplier=Digi-Key, ComponentLink4URL=https://datasheet.ciiva.com/2452/pyu-r-int-thick-7-2452784.pdf?src-supplier=Digi-Key, ComponentLink5Description=https://datasheet.ciiva.com/6067/1018594-6067880.pdf?src-supplier=Farnell, ComponentLink5URL=https://datasheet.ciiva.com/6067/1018594-6067880.pdf?src-supplier=Farnell, ComponentLink6Description=https://datasheet.ciiva.com/22643/1018594-22643413.pdf?src-supplier=Element14, ComponentLink6URL=https://datasheet.ciiva.com/22643/1018594-22643413.pdf?src-supplier=Element14, ComponentLink7Description=https://datasheet.ciiva.com/15189/getdatasheetpartid-326392-15189579.pdf?src-supplier=Verical, ComponentLink7URL=https://datasheet.ciiva.com/15189/getdatasheetpartid-326392-15189579.pdf?src-supplier=Verical, Construction=Chip, Design Item ID="RES 6.8K OHM 5% 1/16W 0402", JESD-609 Code=e3, Mount="Surface Mount", Packaging="Tape and Reel", Pins=2, Pricing 1="1=0.10000, 10=0.01300, 100=0.00540, 1000=0.00244, 2500=0.00212, 5000=0.00175 (USD)", REACH SVHC=Yes, RoHS=Yes, RoHS Compliant=Yes, Size Code=0402, Source=Local.SchLib, Stock 1=599588, Technology="METAL GLAZE/THICK FILM", Terminal Finish=Nickel, Termination=Wraparound
S1: "Slide Switch SPDT Surface Mount, Right Angle", Package=None, Supplier Part Number 1=34AH5830, Digi-Key_Part_Number=401-2012-1-ND, Digi-Key_Purchase_URL=https://www.digikey.com/product-detail/en/c-k/AYZ0102AGRLC/401-2012-1-ND/1640121?utm_source=snapeda&utm_medium=aggregator&utm_campaign=symbol, MF=C&K, MP=AYZ0102AGRLC, SnapEDA_Link=https://www.snapeda.com/parts/AYZ0102AGRLC/C%26K/view-part/50616/?ref=snap, Supplier 1=Newark
TP_5V TP_GND TP_VBAT TP_VBAT_OUT: library part CMP-004-0003-1, Case Code (Imperial)=0603, Case Code (Metric)=1608, Colour=Natural, Manufacturer 1="TE Connectivity", Manufacturer Part Number 1=1625854-3, Max Operating Temperature=125°C, Min Operating Temperature=-55°C, Package Quantity=2000, Resistance=0, Case/Package=0603, ComponentLink1Description=https://datasheet.ciiva.com/30100/1773266-a-30100967.pdf, ComponentLink1URL=https://datasheet.ciiva.com/30100/1773266-a-30100967.pdf, ComponentLink2Description=https://datasheet.ciiva.com/8914/eng-ds-1773266-a-8914634.pdf, ComponentLink2URL=https://datasheet.ciiva.com/8914/eng-ds-1773266-a-8914634.pdf, ComponentLink3Description=https://datasheet.ciiva.com/6439/eng-ds-1773266-a-6439163.pdf, ComponentLink3URL=https://datasheet.ciiva.com/6439/eng-ds-1773266-a-6439163.pdf, ComponentLink4Description=https://datasheet.ciiva.com/6439/eng-ds-1773266-a-6439164.pdf, ComponentLink4URL=https://datasheet.ciiva.com/6439/eng-ds-1773266-a-6439164.pdf, ComponentLink5Description=https://datasheet.ciiva.com/6439/eng-ds-1773266-a-6439165.pdf, ComponentLink5URL=https://datasheet.ciiva.com/6439/eng-ds-1773266-a-6439165.pdf, Depth=0.8mm, Description 1="Thick Film Resistors - SMD 2000", Design Item ID="Test Point 0603 SMD", Height=1.15mm, Length=1.6mm, Military Standard=Not, Mount="Surface Mount", Packaging="Tape and Reel", Pricing 1="1=0.22, 10=0.211, 25=0.18, 50=0.1574, 100=0.1462, 250=0.12932, 500=0.12368, 1000=0.1012 (USD)", Radiation Hardening=No, Source="Schematic Diagrams.SchLib", Stock 1=212628, Termination=SMD/SMT, Width=0.8mm
U2: "Buck Switching Regulator IC Positive Adjustable 0.6V 1 Output 5A SOT-23-6 Thin, TSOT-23-6", Manufacturer="Texas Instruments", Manufacturer Part Number=TPS565201DDCT, Max Operating Temperature=125°C, Min Operating Temperature=-40°C, Design Item ID="IC REG BUCK 4.5V TO 17V, 5A, SYNCHRONOUS STE", Pricing 1="1 = 2.46000, 10 = 2.21100, 100 = 1.77710 (USD)", Source="Schematic Diagrams.SchLib", Stock 1=2226

## Free pads (board coordinates)
  round 1 hole 2: 0(1.4,1.4) 0(1.4,36.2) 0(37,36.2) 0(37.1,1.5)

## Via types
v1: diameter 0.762, hole 0.381, Top Layer to Bottom Layer, 9 vias
v2: diameter 0.6, hole 0.3, Top Layer to Bottom Layer, 7 vias

## Nets (pads, with @x,y where several pads share a name; then routed paths per layer and width w, separated by ;. In a path a pad name is that pad's centre, name@x,y a point inside that pad or via, vN(x,y) a via of type N, cw(c..) or ccw(c..) an arc to the next point about the centre after c; other vN are vias at no path point)
5V: C5.2 C6.1 C7.1 L1.2 P5.1 R4.1 R5.1 TP_5V.1 | length 29.6
  Top Layer w0.254: v2(23.375,17.1) 23.4,17.1 26.475,14.025 26.475,12.475 26.475,10.125 ; L1.2 26.475,5.925 26.475,10.125 ; v2@29.7,13.85 29.7,10.325 C7.1 26.475,10.125
  Bottom Layer w0.254: R4.1 23.375,15.875 v2(23.375,17.1) ; C6.1 30.95,17.725 C5.2 30.95,15.324 v2(29.7,14.075) 32.7,14.075 R5.1
BAT_SENSE: P6.2 R10.1 R11.2 | length 9.9
  Top Layer w0.254: R10.1@20.562,21.713 20.587,21.713 20.798,21.502 20.798,21.477 21.175,21.1 21.175,19.9 R11.2 21.16,19.565 P6.2
EN: P6.1 R6.2 | length 5.2
  Top Layer w0.254: v2(25.15,18.884) 25.166,18.9 26.4,18.9 P6.1@28.075,17.225
  Bottom Layer w0.254: v2(25.15,18.884) 25.15,17.5 R6.2
GND: C1.2 C2.2 C3.1 C5.1 C6.2 C7.2 C8.1 C9.1 C10.1 C11.2 C12.2 C13.2 C14.2 C15.2 C16.2 C17.1 D1.2 LED1.2 LED2.2 LED3.2 P1.2 P2.2 P3.2 P4.2 P5.2 Q3.2 R3.1 R7.1 R11.1 TP_GND.1 U2.1 | length 1.5
  Top Layer w0.254: TP_GND.1@36.375,32.425 TP_GND.1@36.375,33.975
  other v1: 18.16,10.08 33.4,10.08 15.62,15.16 18.16,20.24 15.62,25.32 20.7,25.32 18.16,30.4
NetC1_1: C1.1 Q3.1 S1.2 | length 14.6
  Top Layer w0.254: C1.1@23.925,24.375 C1.1 ; 24.075,22.124 24.224,21.975
  Top Layer w0.5: C1.1@23.925,24.375 Q3.1 ; 24.075,22.124 C1.1 ; 24.224,21.975 32.9,21.975 S1.2
NetC4_1: C4.1 U2.6 | length 3.1
  Top Layer w0.254: v2(24.309,14.338) 24.65,13.997 24.65,13.175 C4.1
  Bottom Layer w0.254: U2.6 22.85,14.35 22.898,14.398 24.249,14.398 v2(24.309,14.338)
NetC4_2: C4.2 L1.1 U2.2 | length 10.6
  Top Layer w0.254: L1.1 L1.1@21.9,6.05 ; v1(21.9,10.525) 21.997,10.622 23.572,10.622 24.527,11.577 24.527,11.627 24.85,11.95 C4.2@24.9,11.95
  Top Layer w1: L1.1@21.9,6.05 v1(21.9,10.525)
  Bottom Layer w0.8: v1(21.9,10.525) U2.2
NetLED1_1: LED1.1 R8.2 | length 2.8
  Bottom Layer w0.254: R8.2 37.125,31.775 LED1.1
NetLED2_1: LED2.1 R9.2 | length 2.2
  Top Layer w0.254: LED2.1 15.15,4.55 R9.2
NetLED3_1: LED3.1 R5.2 | length 2.8
  Bottom Layer w0.254: R5.2 37.225,14.325 LED3.1
NetQ1_4: Q1.4 Q2.4 Q3.3 R2.1 | length 27.8
  Top Layer w0.254: Q2.4 12.362,31.783 12.362,31.338 v2(13.375,30.325) ; v2(22.975,28.875) 22.975,28.819 23.644,28.15 Q3.3 27.275,28.15 27.85,27.575 R2.1 ; v2(23.875,36.35) 23.913,36.312 24.543,36.312 25.125,35.73 Q1.4
  Bottom Layer w0.254: v2(13.375,30.325) 14.825,28.875 v2(22.975,28.875) 22.975,35.937 23.322,36.284 23.809,36.284 v2(23.875,36.35)
NetQ1_5: Q1.5 Q1.6 Q1.7 Q1.8 Q2.5 Q2.6 Q2.7 Q2.8
NetR1_1: R1.1 S1.3 | length 4.1
  Top Layer w0.254: R1.1 33,25.55 33.95,24.6 33.95,23.425 S1.3
NetR3_2: R3.2 S1.1
NetR4_2: R4.2 R7.2 U2.4 | length 4
  Bottom Layer w0.254: R7.2 21.4,16.2 R4.2 20.95,15 U2.4
NetR6_1: R6.1 U2.5 | length 4.4
  Bottom Layer w0.254: U2.5 21.9,14.35 22.569,15.019 24.419,15.019 24.852,15.452 24.852,15.677 25.025,15.85 R6.1@25.25,15.85
VBAT: C2.1 C16.1 C17.2 D1.1 P1.1 Q1.1 Q1.2 Q1.3 R1.2 R2.2 R8.1 TP_VBAT.1 | length 18.8
  Top Layer w0.254: D1.1 30.075,28.575 R1.2 30.075,23.75 30.15,23.675 TP_VBAT.1@31.7,23.675
  Bottom Layer w0.254: P1.1 29.9,34.25 C16.1@29.9,30.275 ; C2.1 29.925,28.425 C17.2 29.9,28.65 C16.1 C16.1@29.9,30.275 ; R8.1 31.311,31.775 30.419,30.883 30.419,30.794 C16.1@29.9,30.275
VBAT_OUT: C3.2 C8.2 C9.2 C10.2 C11.1 C12.1 C13.1 C14.1 C15.1 P2.1 P3.1 P4.1 Q2.1 Q2.2 Q2.3 R9.1 R10.2 TP_VBAT_OUT.1 U2.3 | length 52.6
  Top Layer w0.254: C12.1 14.525,5.475 R9.1 ; C13.1 11.7,18.675 14.575,21.55 R10.2@19.816,21.55 ; TP_VBAT_OUT.1@11.025,26.675 11.3,26.95 12.3,26.95 TP_VBAT_OUT.1@12.575,26.675
  Top Layer w1: P4.1@5.55,11.6 v1(14.1,11.6)
  Bottom Layer w0.254: C9.2@4.474,21.825 C9.2@4.496,21.825 ; C8.2 C8.2@4.647,15.05 ; C9.2 C9.2@4.647,21.825 ; C10.2 4.647,28.3 5.3,27.647 P2.1 5.3,22.478 C9.2@4.647,21.825 ; P4.1 5.3,14.397 C8.2@4.647,15.05 ; C8.2@4.647,15.05 5.3,15.703 P3.1 5.3,21.172 C9.2@4.647,21.825
  Bottom Layer w0.8: C3.2 20.65,11.75 20.725,11.825
  Bottom Layer w1: v1(14.1,11.6) C3.2@19.15,11.6
pads on no net: S1.

## Polygon pours and split planes (outlines as drawn)
VBAT_OUT on Top Layer "NONET_L-01_P-001" (solid, remove dead copper, pour order 0): 4.025,36.675 13.045,36.675 13.317,4.325 11.03,4.325 4.025,4.325
NetQ1_5 on Top Layer "NONET_L-01_P-001" (solid, pour order 2): 16.663,36.35 16.663,31.3 21.038,31.3 21.038,36.35
5V on Top Layer "NONET_L-01_P-001" (solid, pour order 3): 24.725,10.5 31.525,10.5 31.525,0.9 24.725,0.9
VBAT on Top Layer "Top Layer-VBAT" (solid, remove dead copper, pour order 6): 22.925,31.17 27.025,31.17 27.025,28.375 29.275,28.375 29.275,27.425 30.468,27.425 30.56,35.375 22.925,35.375
NetR3_2 on Top Layer "NONET_L-01_P-001" (solid, pour order 7): 33.325,19.7 33.325,17.75 37.925,17.75 37.925,27.05 35.025,27.05 35.15,19.7
GND on Top Layer "NONET_L-01_P-001" (solid, remove dead copper, pour order 8): 0.025,37.525 38.4,37.525 38.4,0 0,0
GND on Bottom Layer "NONET_L-01_P-001" (solid, remove dead copper, pour order 9): 0,37.6 38.6,37.6 38.6,0 0,0

## Keep-outs
Keep-Out Layer:
  lines w0.2: 0,0 38.5,0 38.5,37.6 0,37.6 0,0

## Other copper
Top Layer:
  pour cut-out: 3.979,7.275 5.825,7.275 5.825,4.35 4.025,4.35
  pour cut-out: 22.925,36.717 22.925,35.025 26.579,35.025 26.579,36.717
  pour cut-out: 4.039,34.875 5.95,34.875 5.95,31.325 4.039,31.325

## Silkscreen, mask and mechanical layers (free items; w line width, h text height)
Top Overlay:
  lines w0.254: 34.675,33.575 35.275,33.575 35.275,34.55 34.675,34.55 34.675,33.575
  text "VBAT_OUT" at 6.8,33.133 h0.5
  text "GND" at 2.875,32.75 h0.5
  text "VBAT IN" at 22.525,29.85 h0.5
  text "VBAT OUT" at 8.925,22.75 h0.5 r90
  text "BAT_SENSE" at 27.35,20.833 h0.5
  text "GND" at 15.225,18.35 h0.5
  text "VBAT_OUT" at 8.842,16.55 h0.5 r90
  text "5V_EN" at 27.239,15.199 h0.5
  text "5V_EN" at 27.15,15.108 h0.5
  text "VBAT OUT" at 9.05,10.075 h0.5 r90
  text "GND" at 35.575,9.875 h0.5
  text "5V" at 29.975,9.85 h0.5
  text "VBAT_OUT" at 7.075,5.208 h0.5
  text "GND" at 2.675,5.15 h0.5
  text "5V OUT" at 37.7,3 h0.5 r90
Bottom Overlay:
  drawing of 77 lines, arcs and shapes, not listed
  text "GND" at 32.525,32.775 h0.5
  text "VBAT" at 30.25,32.75 h0.5
  text "VBAT_OUT" at 10.575,32.333 h0.5
  text "GND" at 3.725,32.175 h0.5
  text "GND" at 3,23.175 h0.5
  text "VBAT_OUT" at 7.675,23.158 h0.5
  text "PD BOARD REV1" at 28.246,22.654 h1.52
  text "SWITCH" at 37.85,22.6 h0.5 r90
  text "vbat" at 35.725,22.075 h0.5
  text "BAT_SENSE" at 31.5,20.808 h0.5
  text "nmos gate" at 35.75,19.692 h0.5
  text "gnd" at 36,18.092 h0.5
  text "GND" at 16.575,17.35 h0.5
  text "VBAT_OUT" at 12.15,17.283 h0.5
  text "GND" at 3.25,16.625 h0.5
  text "VBAT_OUT" at 7.675,16.558 h0.5
  text "5V_EN" at 29.525,15.133 h0.5
  text "VBAT_OUT" at 7.7,10.158 h0.5
  text "GND" at 3,10 h0.5
  text "5V" at 30.65,8.9 h0.5
  text "GND" at 36.75,8.75 h0.5
  text "SUN FLOWER" at 25.796,6.704 h1.52
  text "VBAT_OUT" at 10.85,4.333 h0.5
  text "GND" at 4.475,4.225 h0.5
  text "GND" at 34.225,1.925 h0.5
  text "5V" at 31.425,1.825 h0.5